# Altium PCB filtroPB.PcbDoc
Units mm, origin at the board's own origin, x right, y up, seen from the top; angles counter-clockwise.
Board outline 25 x 25 mm, 2 copper layers (Top Layer, Bottom Layer); 13 components, 7 nets, 26 pads, 0 vias.
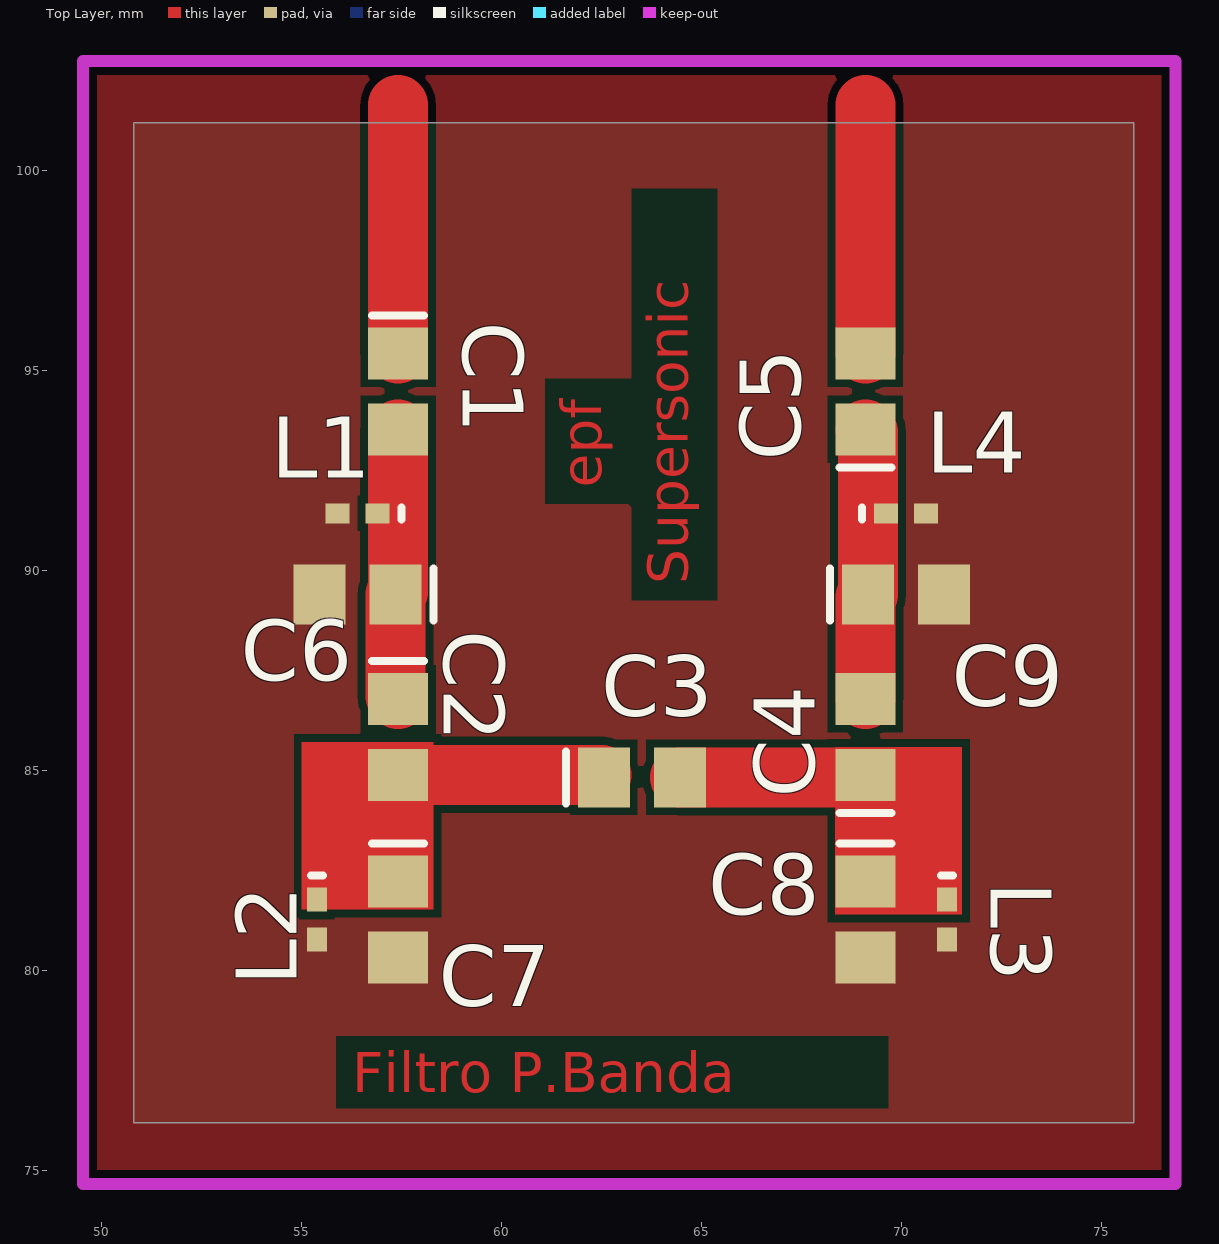
[diagram p0: Top Layer view]
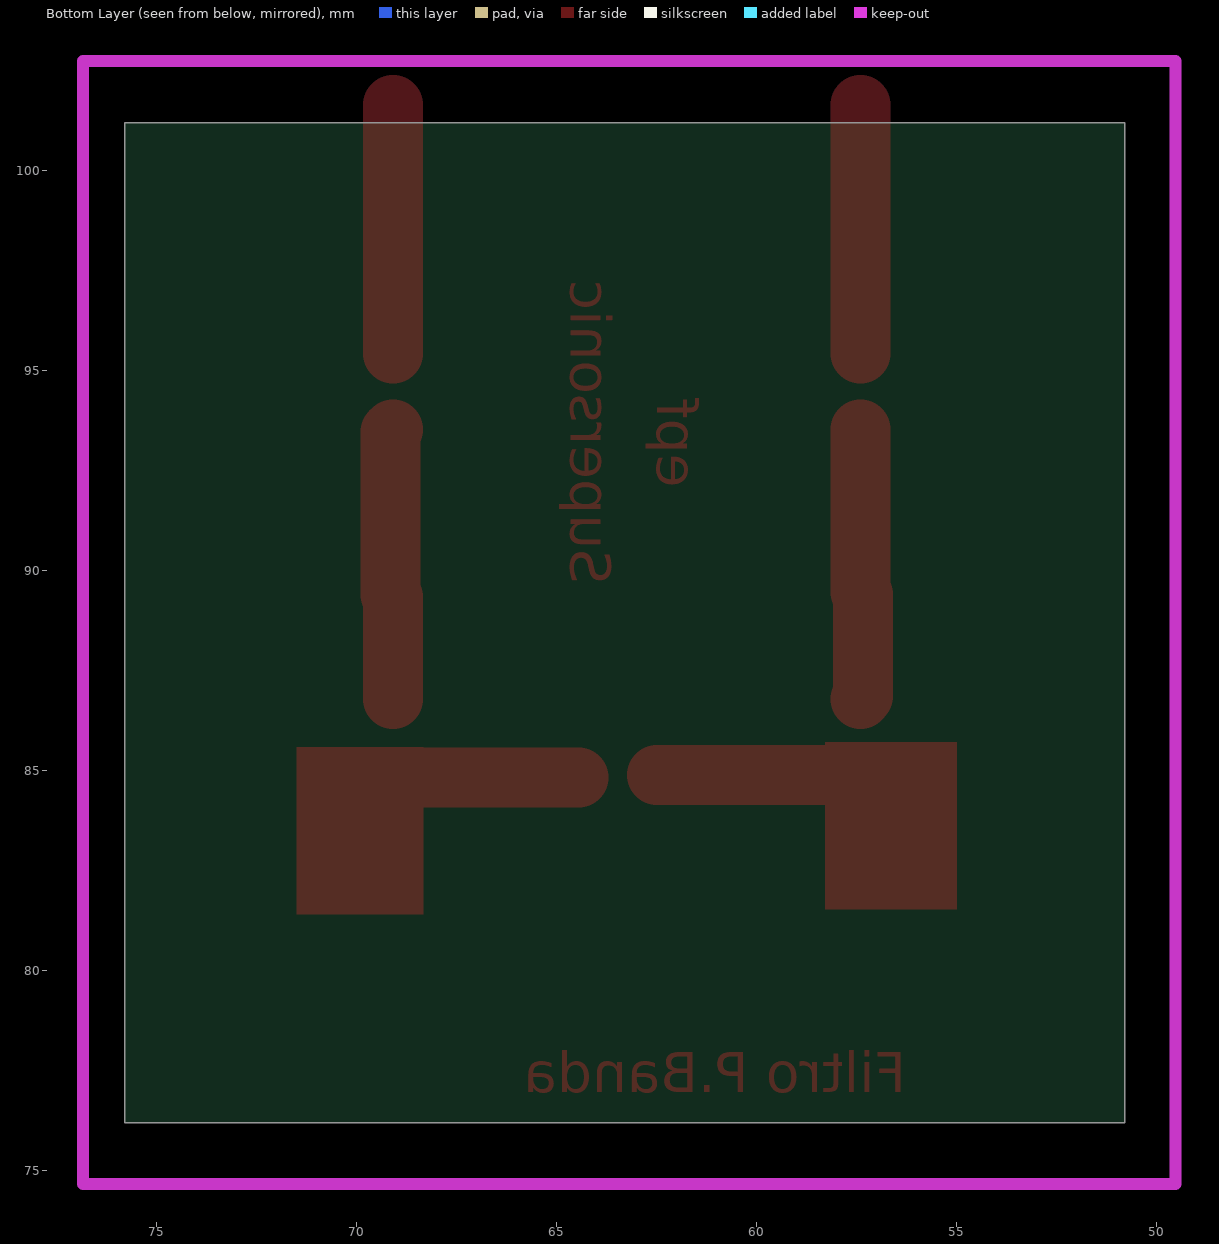
[diagram p1: Bottom Layer view, seen from below]

## Layer stack, top to bottom
Top Layer: signal copper 0.0356
Dielectric: dielectric 0.32, FR-4, Dk 4.8
Bottom Layer: signal copper 0.0356

## Board outline
50.8,76.2 75.8,76.2 75.8,101.2 50.8,101.2

## Design rules (kind name [scope] priority, off if disabled: settings)
Clearance [All] p1: gap=0.2
ComponentClearance [All] p1: gap=0.254 collisioncheckmode=3 verticalgap=0.254
PolygonConnect [All] p1: connectstyle=Direct reliefconductorwidth=0.254 reliefentries=4 polygonreliefangle="90 Angle"
RoomDefinition FiltroPB_acoplado [InComponentClass('FiltroPB_acoplado')] p1: confinementstyle=ConfineIn formatcopy=TRUE lockcomponents=FALSE outline 50.419,75.438 76.327,75.438 76.327,101.854 50.419,101.854
RoutingVias [All] p1: holewidth=0.6 width=2 viastyle="Through Hole" minholewidth=0.5 minwidth=1.27 maxholewidth=0.711 maxwidth=3
SolderMaskExpansion [All] p1: expansion=0.102
TestPointUsage [All] p1: valid=0 allowmultiple=FALSE
Testpoint [All] p1: side=15 testpointundercomponent=TRUE minsize=1.016 maxsize=2.54 preferedsize=1.524 minholesize=0 maxholesize=1.016 preferedholesize=0.813 testpointgrid=0.025 style=1023 order=0123456789
Width [All] p1: maxlimit=3 minlimit=0.2 preferedwidth=2
18 further rules are at their usual default settings.

## Components (designator, comment, footprint, x,y, rotation, side; value= is the part's Value field where it differs from the comment)
C1 "Cap Pol3" C0805 57.404,94.488 r270 top
C2 "Cap Pol3" C0805 57.404,85.852 r270 top
C3 "Cap Pol3" C0805 63.5,84.836 r0 top
C4 "Cap Pol3" C0805 69.088,85.852 r90 top
C5 "Cap Pol3" C0805 69.088,94.488 r90 top
C6 "Cap Pol3" C0805 56.388,89.408 r180 top
C7 "Cap Pol3" C0805 57.404,81.28 r270 top
C8 "Cap Pol3" C0805 69.088,81.28 r270 top
C9 "Cap Pol3" C0805 70.104,89.408 r0 top
L1 "Inductor" 0402-A 56.388,91.44 r180 top
L2 "Inductor" 0402-A 55.372,81.28 r270 top
L3 "Inductor" 0402-A 71.12,81.28 r270 top
L4 "Inductor" 0402-A 70.104,91.44 r0 top

## Footprints (in the part's own frame and the unit in brackets; to place one, negate y for a bottom-side part, rotate by r counter-clockwise, add the part's x,y. Pads: shape width x height; smd on the part's side, far side on the other; paste and mask are expansions set on the pad)
0402-A [mm] "Chip Inductor; Body 1 x 0.5 mm (LxW typ)"
  rect 0.6x0.5 smd: 1(-0.5,0) 2(0.5,0)
  silkscreen extent -1.1,-0.15 -1.1,0.15
C0805 [mm] "Chip Capacitor; Body 2.0 x 1.2 mm (LxW typ)"
  rect 1.3x1.5 smd: 1(-0.95,0) 2(0.95,0)
  silkscreen extent -1.9,-0.65 -1.9,0.65

## Part data
C1 C2 C3 C4 C5 C6 C7 C8 C9: "Polarized Capacitor (Surface Mount)"

## Nets (pads, with @x,y where several pads share a name; then routed paths per layer and width w, separated by ;. In a path a pad name is that pad's centre, name@x,y a point inside that pad or via, vN(x,y) a via of type N, cw(c..) or ccw(c..) an arc to the next point about the centre after c; other vN are vias at no path point)
GND: C6.2 C7.2 C8.2 C9.2 L1.2 L2.2 L3.2 L4.2
IN: C1.1 | length 6.2
  Top Layer w1.5: C1.1 57.404,101.643
NetC1_2: C1.2 C2.1 C6.1 L1.1 | length 6.8
  Top Layer w1.5: C2.1 57.338,86.868 C6.1 57.404,89.474 C1.2
NetC2_2: C2.2 C3.1 C7.1 L2.1 | length 5.2
  Top Layer w1: C3.1@62.484,84.902 C3.1
  Top Layer w1.5: C2.2 C3.1@62.484,84.902
NetC3_2: C3.2 C4.1 C8.1 L3.1 | length 4.7
  Top Layer w1: C4.1@69.022,84.836 C4.1
  Top Layer w1.5: C3.2 C4.1@69.022,84.836
NetC4_2: C4.2 C5.1 C9.1 L4.1 | length 6.8
  Top Layer w1.5: C4.2 69.088,89.342 C9.1 69.154,93.472 C5.1
OUT: C5.2 | length 6.2
  Top Layer w1.5: C5.2 69.088,101.643

## Polygon pours and split planes (outlines as drawn)
GND on Top Layer (solid): 49.53,102.743 49.53,74.676 76.835,74.676 76.835,102.743

## Keep-outs
Keep-Out Layer:
  lines w0.3: 49.53,74.676 49.53,102.743 76.835,102.743 76.835,74.676 49.53,74.676

## Other copper
Top Layer:
  rectangle net NetC3_2: 68.326,81.407 71.501,85.598
  rectangle net NetC2_2: 54.991,81.534 58.293,85.725
  text "epf" at 62.484,92.075 h1 r90
  text "Supersonic" at 64.643,89.662 h1 r90
  text "Filtro P.Banda" at 56.261,76.962 h1

## Silkscreen, mask and mechanical layers (free items; w line width, h text height)
Drill Drawing:
  text ".LEGEND" at 80.88,81.28 h1.52
  text "Drill Drawing." at 80.88,78.74 h1.52

## Dimensions
49.53,74.676 to 49.53,102.743 on Mechanical 1
49.53,74.676 to 76.835,74.676 on Mechanical 1